# Altium PCB PCB1.PcbDoc (part 2 of 2)
Units mm, origin at the board's own origin, x right, y up, seen from the top; angles counter-clockwise.
Board outline 70 x 15 mm, 4 copper layers (Top Layer, GND, VCC, Bottom Layer), stack 0.694 mm thick; 63 components, 43 nets, 212 pads, 80 vias.
Unrouted connection lines stored in the file: 38.
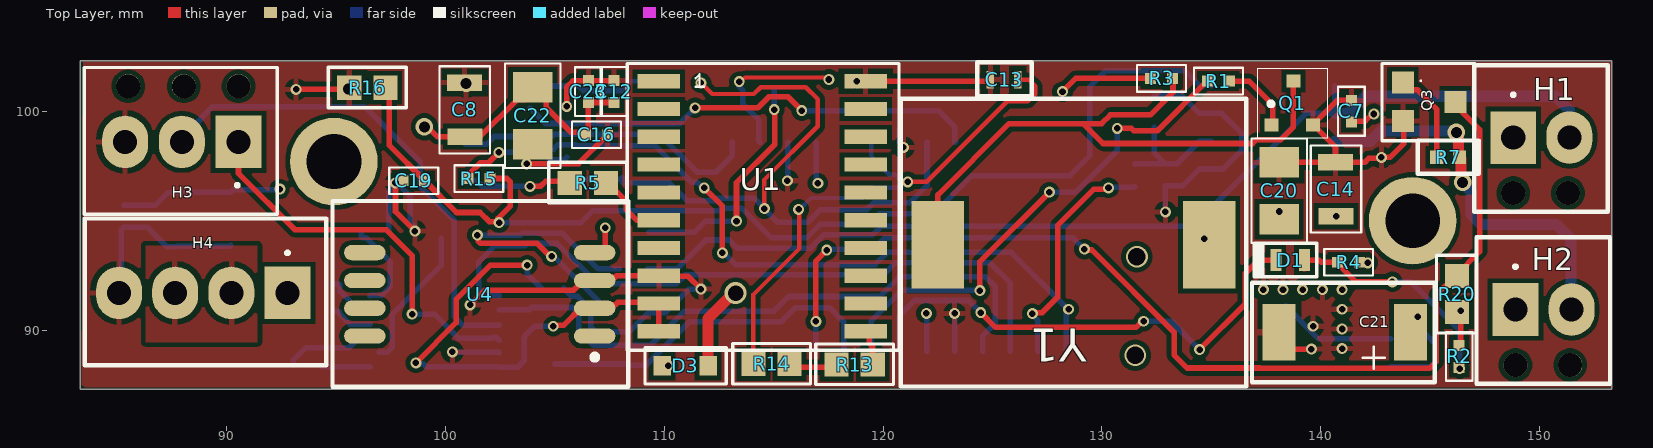
[diagram p0: Top Layer view]

## Part data (continued)
U3: "Microchip PIC18F2523-I/SO; 8bit PIC Microcontroller; 40MHz; 32 kB Flash; 28-Pin SOIC", Case/Package=SOIC, Frequency=40MHz, Manufacturer=Microchip, Max Operating Temperature=85°C, Max Power Dissipation=1W, Max Supply Voltage=5.5V, Min Operating Temperature=-40°C, Min Supply Voltage=4.2V, Package Quantity=27, Category=Microcontrollers, ComponentLink1Description=https://datasheet.ciiva.com/1493/39755c-1493947.pdf?src-supplier=Digikey, ComponentLink1URL=https://datasheet.ciiva.com/1493/39755c-1493947.pdf?src-supplier=Digikey, ComponentLink2Description=https://datasheet.ciiva.com/16478/39755c-16478411.pdf?src-supplier=Future+Electronics, ComponentLink2URL=https://datasheet.ciiva.com/16478/39755c-16478411.pdf?src-supplier=Future+Electronics, ComponentLink3Description=https://datasheet.ciiva.com/7774/39755c-7774347.pdf?src-supplier=Element14, ComponentLink3URL=https://datasheet.ciiva.com/7774/39755c-7774347.pdf?src-supplier=Element14, Core Architecture=PIC, Data Bus Width=8b, Density=32KB, Height=2.35mm, Interface=I2C,SPI,UART,USART, Lead Free="Lead Free", Length=17.9mm, Manufacturer Part Number=PIC18F2523-I/SO, Max Frequency=40MHz, Memory Size=32KB, Memory Type=FLASH, Mount="Surface Mount", Number of ADC Channels=10, Number of Bits=8, Number of I2C Channels=1, Number of I/Os=25, Number of Pins=28, Number of Programmable I/O=25, Number of PWM Channels=2, Number of SPI Channels=1, Number of Timers/Counters=4, Number of UART Channels=1, Oscillator Type=Internal, Packaging=Rail/Tube, Peripherals="Brown-out Detect/Reset,POR,PWM,WDT,HLVD,I2C", Pricing 1="54=4,674, 108=4,667 (USD)", Radiation Hardening=No, RAM Size=1.5KB, Reach SVHC Compliant=No, RoHS=Yes, RoHS Compliant=Yes, Series="PIC® 18F", Stock 1=54, Supplier 1="Arrow Electronics", Supplier Part Number 1=PIC18F2523-I/SO, Termination=SMD/SMT, Watchdog Timer=Yes, Width=7.5mm
U4: "SENSOR ABS PRESS 16.7PSI MAX", Case/Package=SSOP, Manufacturer="NXP Semiconductors", Max Operating Temperature=125°C, Max Supply Voltage=5.25V, Min Operating Temperature=-40°C, Min Supply Voltage=4.75V, Operating Pressure=16.68PSI, Operating Supply Voltage=5V, Supply Current=6mA, Accuracy=1.5%, Category="Pressure Sensors", ComponentLink1Description=https://datasheet.ciiva.com/2825/mpxa6115a-2825344.pdf?src-supplier=Digikey, ComponentLink1URL=https://datasheet.ciiva.com/2825/mpxa6115a-2825344.pdf?src-supplier=Digikey, ComponentLink2Description=https://datasheet.ciiva.com/1513/1748876-1513862.pdf?src-supplier=Element14, ComponentLink2URL=https://datasheet.ciiva.com/1513/1748876-1513862.pdf?src-supplier=Element14, Manufacturer Part Number=MPXH6115A6U, Max Pressure=58.02PSI, Number of Pins=8, Output Type="Analog Voltage,Analog", Port Style="No Port", Pressure Type=Absolute, Pricing 1="65=9,711, 130=9,651, 520=8,857, 1040=8,847 (USD)", Reach SVHC Compliant=No, RoHS=No, Series=MPXH6115A, Stock 1=5, Supplier 1="Arrow Electronics", Supplier Part Number 1=MPXH6115A6U, Termination=PCB
U5: "IRF7101PBF Dual N-channel MOSFET Transistor; 3.5 A; 20 V; 8-Pin SOIC", Case/Package=SOIC, Continuous Drain Current (ID)=3.5A, Drain to Source Voltage (Vdss)=20V, Drain-source On Resistance-Max=100mR, Gate to Source Voltage (Vgs)=12V, Input Capacitance=320pF, Manufacturer="International Rectifier", Max Operating Temperature=150°C, Max Power Dissipation=2W, Min Operating Temperature=-55°C, Package Quantity=1, Supplier Part Number 1=70016974, ComponentLink1Description=https://datasheet.ciiva.com/6385/irf7101pbf-6385610.pdf?src-supplier=Digikey, ComponentLink1URL=https://datasheet.ciiva.com/6385/irf7101pbf-6385610.pdf?src-supplier=Digikey, ComponentLink2Description=https://datasheet.ciiva.com/6385/irf7101pbf-6385613.pdf?src-supplier=Digikey, ComponentLink2URL=https://datasheet.ciiva.com/6385/irf7101pbf-6385613.pdf?src-supplier=Digikey, ComponentLink3Description=https://datasheet.ciiva.com/6385/irf7101pbf-6385615.pdf?src-supplier=Digikey, ComponentLink3URL=https://datasheet.ciiva.com/6385/irf7101pbf-6385615.pdf?src-supplier=Digikey, ComponentLink4Description=https://datasheet.ciiva.com/16359/irf7101pbf-16359627.pdf?src-supplier=Future+Electronics, ComponentLink4URL=https://datasheet.ciiva.com/16359/irf7101pbf-16359627.pdf?src-supplier=Future+Electronics, Current Rating=3.5A, FET Type="2 N-Channel", Height=1.5mm, Lead Free="Lead Free", Length=5mm, Manufacturer Part Number=IRF7101TRPBF, Mount="Surface Mount", Number of Pins=8, Packaging="Cut Tape", Rds On Max=100mR, RoHS=Yes, RoHS Compliant=Yes, Series=HEXFET®, Supplier 1="Allied Electronics", Turn-Off Delay Time=24ns, Turn-On Delay Time=7ns, Voltage Rating (DC)=20V, Width=4mm
U6: "MC78M00 Series 0.5 A 5 V Fixed Output SMT LDO Voltage Regulator - DPAK", Case/Package=DPAK, Current Rating=700mA, Dropout Voltage=2V, Input Bias Current=3.2mA, Manufacturer="ON Semiconductor", Max Input Voltage=35V, Max Operating Temperature=125°C, Max Output Current=500mA, Min Input Voltage=7V, Min Operating Temperature=-40°C, Min Output Voltage=5V, Package Quantity=75, Power Supply Rejection Ratio (PSRR)=80dB, Supplier Part Number 1=8771974, Accuracy=4%, Category="Voltage Regulators - Linear", ComponentLink1Description=https://datasheet.ciiva.com/2052/mc78m00-d-2052360.pdf?src-supplier=Digikey, ComponentLink1URL=https://datasheet.ciiva.com/2052/mc78m00-d-2052360.pdf?src-supplier=Digikey, ComponentLink2Description=https://datasheet.ciiva.com/3224/mc78m00-d-3224079.pdf?src-supplier=Avnet, ComponentLink2URL=https://datasheet.ciiva.com/3224/mc78m00-d-3224079.pdf?src-supplier=Avnet, ComponentLink3Description=https://datasheet.ciiva.com/16381/mc78m00-d-16381163.pdf?src-supplier=Future+Electronics, ComponentLink3URL=https://datasheet.ciiva.com/16381/mc78m00-d-16381163.pdf?src-supplier=Future+Electronics, ComponentLink4Description=https://datasheet.ciiva.com/7992/1746757-7992652.pdf?src-supplier=Element14, ComponentLink4URL=https://datasheet.ciiva.com/7992/1746757-7992652.pdf?src-supplier=Element14, ComponentLink5Description=https://datasheet.ciiva.com/4882/mc78m00-d-88441-4882543.pdf?src-supplier=Mouser, ComponentLink5URL=https://datasheet.ciiva.com/4882/mc78m00-d-88441-4882543.pdf?src-supplier=Mouser, ComponentLink6Description=https://datasheet.ciiva.com/18435/70099623-18435694.pdf?src-supplier=Allied+Electronics, ComponentLink6URL=https://datasheet.ciiva.com/18435/70099623-18435694.pdf?src-supplier=Allied+Electronics, Halogen Free="Halogen Free", Height=2.38mm, Lead Free="Lead Free", Length=6.73mm, Manufacturer Part Number=MC78M05BDTG, Mount="Surface Mount", Nominal Output Voltage=5V, Nominal Supply Current=3.2mA, Number of Channels=1, Number of Outputs=1, Number of Pins=3, Number of Regulators=1, Operating Supply Voltage=35V, Output Configuration=Positive, Output Current=500mA, Output Type=Fixed, Output Voltage=5V, Packaging=Rail/Tube, Polarity=Positive, Pricing 1="1=0,22, 200=0,215, 750=0,205, 2000=0,198, 7500=0,185 (USD)", Radiation Hardening=No, Reach SVHC Compliant=No, RoHS=Yes, RoHS Compliant=Yes, Series=-, Stock 1=7370, Supplier 1="Future Electronics", Width=6.22mm
X1: library part NX5032GA-10.000000MHZ-LN-CD-1, "Crystal 10.0000MHZ 8PF SMD", Case/Package=SMD/SMT, ESR (Equivalent Series Resistance)=120R, Frequency=10MHz, Frequency Stability=50ppm, Load Capacitance=8pF, Manufacturer=NDK, Max Operating Temperature=70°C, Min Operating Temperature=-10°C, Package Quantity=1, Supplier Part Number 1=NX5032GA-10.00E, Category=Crystals, ComponentLink1Description=https://datasheet.ciiva.com/856/nx5032ga-856809.pdf?src-supplier=Digikey, ComponentLink1URL=https://datasheet.ciiva.com/856/nx5032ga-856809.pdf?src-supplier=Digikey, ComponentLink2Description=https://datasheet.ciiva.com/856/nx5032ga-856810.pdf?src-supplier=Digikey, ComponentLink2URL=https://datasheet.ciiva.com/856/nx5032ga-856810.pdf?src-supplier=Digikey, ComponentLink3Description=https://datasheet.ciiva.com/856/nx5032ga-856811.pdf?src-supplier=Digikey, ComponentLink3URL=https://datasheet.ciiva.com/856/nx5032ga-856811.pdf?src-supplier=Digikey, Frequency Tolerance=50ppm, Height=0.059inch, Length=0.197inch, Manufacturer Part Number=NX5032GA-10.000000MHZ-LN-CD-1, Mount="Surface Mount", Number of Pins=2, Packaging="Cut Tape", RoHS=Yes, Series=NX5032GA, Supplier 1="Richardson RFPD", Width=0.126inch
Y1: library part PKLCS1212E4001-R1, "AUDIO PIEZO TRANSDUCER 25V SMD / Audio Buzzer Piezo 75dB Surface Mount Solder Pad T/R", Clock Frequency=4kHz, Manufacturer=Murata, Max Operating Temperature=70°C, Max Supply Voltage=25V, Min Operating Temperature=-20°C, Nominal Supply Voltage=3V, Package Quantity=1, Supplier Part Number=81-PKLCS1212E4001, Voltage Rating=1.5V, Category=Speakers, ComponentLink1Description=https://datasheet.ciiva.com/4625/pklcs-datasheet-202916-4625328.pdf?src-supplier=Mouser, ComponentLink1URL=https://datasheet.ciiva.com/4625/pklcs-datasheet-202916-4625328.pdf?src-supplier=Mouser, ComponentLink2Description=https://datasheet.ciiva.com/16224/s0039e-16224145.pdf?src-supplier=Future+Electronics, ComponentLink2URL=https://datasheet.ciiva.com/16224/s0039e-16224145.pdf?src-supplier=Future+Electronics, ComponentLink3Description=https://datasheet.ciiva.com/11776/0900766b807da0c7-11776763.pdf?src-supplier=Rs, ComponentLink3URL=https://datasheet.ciiva.com/11776/0900766b807da0c7-11776763.pdf?src-supplier=Rs, ComponentLink4Description=https://datasheet.ciiva.com/3333/03787173-3333942.pdf?src-supplier=Distrelec, ComponentLink4URL=https://datasheet.ciiva.com/3333/03787173-3333942.pdf?src-supplier=Distrelec, ComponentLink5Description=https://datasheet.ciiva.com/1323/1626578-1323984.pdf?src-supplier=Element14, ComponentLink5URL=https://datasheet.ciiva.com/1323/1626578-1323984.pdf?src-supplier=Element14, ComponentLink6Description=https://datasheet.ciiva.com/0/s0039e-123.pdf?src-supplier=Digikey, ComponentLink6URL=https://datasheet.ciiva.com/0/s0039e-123.pdf?src-supplier=Digikey, ComponentLink7Description=https://datasheet.ciiva.com/0/s0039e-124.pdf?src-supplier=Digikey, ComponentLink7URL=https://datasheet.ciiva.com/0/s0039e-124.pdf?src-supplier=Digikey, ComponentLink8Description=https://datasheet.ciiva.com/0/s0039e-125.pdf?src-supplier=Digikey, ComponentLink8URL=https://datasheet.ciiva.com/0/s0039e-125.pdf?src-supplier=Digikey, ComponentLink9Description=https://datasheet.ciiva.com/18141/p37e-18141127.pdf?src-supplier=Verical, ComponentLink9URL=https://datasheet.ciiva.com/18141/p37e-18141127.pdf?src-supplier=Verical, ComponentLink10Description=https://datasheet.ciiva.com/8084/p37e-8084265.pdf?src-supplier=Avnet, ComponentLink10URL=https://datasheet.ciiva.com/8084/p37e-8084265.pdf?src-supplier=Avnet, ComponentLink11Description=https://datasheet.ciiva.com/1323/9058-1323985.pdf?src-supplier=Element14, ComponentLink11URL=https://datasheet.ciiva.com/1323/9058-1323985.pdf?src-supplier=Element14, Depth=12mm, Diameter=12mm, Frequency=4kHz, Height=3mm, Lead Free="Lead Free", Length=12mm, Manufacturer Part Number=PKLCS1212E4001-R1, Mounting Technology="Surface Mount", Packaging="Tape and Reel", Pricing="1=1,04, 10=0,86, 50=0,758, 100=0,718, 1000=0,534, 10000=0,529 (USD)", Radiation Hardening=No, Reach SVHC Compliant=No, RoHS=Yes, Self Resonant Frequency=4kHz, Series=PK, Stock=27239, Supplier=Mouser, Termination=Solder, Voltage Rating (DC)=25V, Washable=No, Width=12mm

## Free pads (board coordinates)
  round 4 hole 2.5: 1(94.9,97.7) 1(144.2,95)

## Via types
v1: diameter 0.5, hole 0.3, Top Layer to Bottom Layer, 70 vias
v2: diameter 0.8, hole 0.5, Top Layer to Bottom Layer, 5 vias
v3: diameter 0.5/0.5 (per signal layer), hole 0.3, Top Layer to Bottom Layer, 2 vias
v4: diameter 1, hole 0.8, Top Layer to Bottom Layer, 2 vias
v5: diameter 1, hole 0.7, Top Layer to Bottom Layer, 1 vias

## Nets (pads, with @x,y where several pads share a name; then routed paths per layer and width w, separated by ;. In a path a pad name is that pad's centre, name@x,y a point inside that pad or via, vN(x,y) a via of type N, cw(c..) or ccw(c..) an arc to the next point about the centre after c; other vN are vias at no path point)
+BAT: C20.2 C21.1 D3.2 H1.1 H2.1 R17.1 U6.1 | length 5.3
  Top Layer w0.508: D3.2 112,90.537 113.151,91.688 v5(113.259,91.688)
  Bottom Layer w0.254: v1(144.425,90.6) 144.472,90.553 144.472,90.128 R17.1@145.1,89.5
  other v1: 138.1,95.418
  other v4: 131.522,88.85
+VIN: D3.1 H4.1
  other v1: 110.175,88.375
BUZZER: R1.1 U3.22 | length 22.7
  Top Layer w0.254: v1(124.425,91.8) 124.425,93.125 v1(127.6,96.3) ; v1(130.7,99.215) 131.347,99.215 131.458,99.104 132.529,99.104 R1.1@134.8,101.375
  Bottom Layer w0.254: U3.22 119.465,90.431 120.848,91.814 124.411,91.814 v1(124.425,91.8) ; v1(127.6,96.3) 128.8,96.3 130.7,98.2 v1(130.7,99.215)
CHRG1: R11.2 U3.16 | length 10.8
  Top Layer w0.254: v1(126.825,90.75) 126.872,90.797 127.272,90.797 127.975,91.5 127.975,94.782 129.635,96.442 130.242,96.442 v1(130.3,96.5)
  Bottom Layer w0.254: v1(126.825,90.75) 126.825,90.683 127.077,90.431 127.077,89.033 U3.16 ; v1(130.3,96.5) 130.325,96.525 131.475,96.525 R11.2@131.5,96.55
CHRG1_DETCT: Q3.3 R20.1 U3.24 | length 49
  Top Layer w0.254: v1(116.925,90.394) 116.925,93.15 v1(117.425,93.65) ; v1(129.2,93.7) 129.242,93.658 129.542,93.658 133.299,89.901 133.299,88.863 133.897,88.265 137.208,88.265 137.21,88.263 144.99,88.263 145.275,88.548 145.275,91.6 146.2,92.525 147.262,93.587 147.262,99.163 Q3.3@146.2,100.225
  Bottom Layer w0.254: U3.24@116.925,89.1 v1(116.925,90.394) ; v1(117.425,93.65) 117.472,93.697 119.554,93.697 120.073,94.216 128.684,94.216 v1(129.2,93.7)
CHRG1_SENSE: H2.2 R7.2 U5.7 U5.8 | length 19.3
  Top Layer w0.508: v2(146.202,99.035) 146.202,98.956 146.304,98.854 146.304,97.946 R7.2@146.396,97.854 ; R7.2@146.416,97.834 146.416,96.814 v2(146.482,96.749)
  Bottom Layer w0.254: U5.8 U5.7 ; v2@146.482,96.708 v2(146.482,96.749)
  Bottom Layer w0.508: U5.7 142.268,98.63 142.728,99.09 146.147,99.09 v2(146.202,99.035) ; v2@146.482,96.708 146.863,96.327 146.863,95.275 147.32,94.818 150.774,94.818 151.44,94.153 H2.2@151.44,90.94
CHRG2: R15.2 U3.15 | length 34.7
  Top Layer w0.254: 101.15,97.2 101.587,97.637 101.955,97.637 v1(102.438,98.12) ; v1(111.825,96.5) 112.652,95.673 v1(112.652,93.53)
  Bottom Layer w0.254: v1(102.438,98.12) 103.069,98.12 103.196,98.247 104.916,98.247 105.147,98.479 105.927,98.479 105.978,98.427 109.576,98.427 111.254,96.749 111.509,96.749 111.758,96.5 v1(111.825,96.5) ; v1(112.652,93.53) 112.719,93.53 113.259,92.989 119.634,92.989 120.193,93.548 125.846,93.548 128.445,90.95 v1(128.475,90.95) 128.475,90.883 128.365,90.773 128.365,89.035 U3.15
CHRG2_DETCT: Q2.3 R21.1 U3.23 | length 15.9
  Bottom Layer w0.254: R21.1 108.35,88.45 Q2.3 109.175,88.4 111.162,90.387 115.355,90.387 115.993,91.025 117.55,91.025 118.195,90.38 U3.23
CHRG2_SENSE: H1.2 R19.2 U5.5 U5.6 | length 48.5
  Bottom Layer w0.254: R19.2 110.58,92.8 111.897,94.117 112.96,94.117 113.329,93.747 116.692,93.747 117.308,94.363 119.534,94.363 119.917,94.746 134.169,94.746 139.323,99.9 U5.6 U5.5
  Bottom Layer w0.508: U5.6 141.253,99.9 142.039,100.686 150.735,100.686 151.37,100.051 H1.2@151.37,98.8
GND: C1.1 C2.1 C5.1 C6.2 C7.1 C8.2 C9.2 C10.2 C11.1 C12.1 C13.1 C14.1 C15.1 C16.1 C17.1 C18.2 C19.1 C20.1 C21.2 C22.1 C23.1 C24.1 D2.2 H3.3 H4.4 Q1.2 Q2.2 Q3.2 R12.2 R16.2 U1.8 U1.20 U2.15 U3.4 U3.8 U3.19 U4.3 U5.1 U5.3 U6.4 | length 89.7
  Top Layer w0.254: v1(93.175,101) 95.55,101 R16.2@95.6,100.95 ; C19.1 97.995,96.77 97.761,96.77 v1(97.714,96.723) 97.714,95.411 v1(98.6,94.525) ; v1(101.125,91.15) 101.8,91.825 105.861,91.825 U4.3@106.371,92.335 ; v1(103.708,97.597) 104.974,97.597 104.988,97.61 106.085,97.61 C16.1 ; v1(105.54,100.222) 105.54,101.109 105.818,101.387 106.287,101.387 106.3,101.4 C12.1 ; U4.3@106.85,92.335 106.935,92.42 107.757,92.42 107.822,92.485 109.75,92.485 109.78,92.455 111.095,92.455 v1(111.675,91.875) ; v1(118.786,101.371) 124.854,101.371 124.902,101.419 C13.1 ; C21.2@138.1,89.948 138.1,89.648 138.623,89.125 v1(139.575,89.125) ; C20.1@138.103,97.67 C14.1 ; Q1.2 Q1.2@139.675,99.375 ; C7.1 140.75,100.5 139.848,99.598 139.848,99.548 Q1.2@139.675,99.375 ; v1(142.773,97.892) 143.167,97.892 143.8,98.524 Q3.2@143.8,99.35 ; v1@142.82,97.939 142.726,97.845 142.19,97.845 142.015,97.67 C14.1 ; Q1.2@139.675,99.375 140.675,98.375 C14.1
  Bottom Layer w0.254: H4.4 85.19,91.81 85.19,94.59 C1.1 86.375,94.7 87.275,93.8 87.7,93.8 87.732,93.832 90.155,93.832 C11.1@90.187,93.865 ; v2(95.555,101.016) v2@95.64,101.016 ; C5.1 97.4,96.343 97.714,96.657 v1(97.714,96.723) 97.78,96.723 98.382,96.121 98.382,95.87 98.387,95.865 98.387,94.922 98.536,94.773 98.552,94.773 98.6,94.725 v1(98.6,94.525) ; v1(100.318,88.999) 100.33,88.987 102.438,88.987 U2.15 ; v1(101.125,91.15) v1@101.125,91.217 ; v1(103.708,97.597) 104.612,97.597 104.798,97.783 105.429,97.783 C18.2 ; C10.2 105.761,91.539 106.036,91.539 106.644,90.931 106.644,90.142 106.867,89.919 108.394,89.919 Q2.2 110.05,90.8 111.125,91.875 v1(111.675,91.875) ; v1(115.625,96.825) 115.64,96.84 115.64,98.56 U3.4 ; C24.1@118.786,101.146 v1(118.786,101.371) ; U3.8 U3.8@120.735,99.197 ; v1(123.272,90.763) 123.274,90.762 123.274,89.026 U3.19 ; R12.2@132.4,100.7 133.667,100.7 134.467,99.9 U5.3 135.476,99.9 136.4,98.976 136.4,98.227 135.533,97.36 U5.1 134.467,97.36 133.707,96.6 C17.1 v1(132.9,95.402) ; U6.4 139.9,89.6 D2.2 ; U6.4@140.962,89.993 U6.4@140.962,90.038
  other v1: 140.975,89.15 140.975,90.05 139.65,90.175 140.975,90.95 137.375,91.85 138.275,91.85 139.175,91.85 140.075,91.85 140.975,91.85 120.929,98.349
  other v2: 100.94,101.27
LED_STATUS: D1.2 U3.21 | length 22.8
  Top Layer w0.254: v1(124.461,90.799) 125.141,90.119 131.556,90.119 131.839,90.402 v1(131.906,90.402) ; v1(134.468,89.103) 136.55,91.186 136.55,92.59 137.16,93.2 D1.2
  Bottom Layer w0.254: U3.21 120.735,90.639 121.446,91.35 123.91,91.35 v1(124.461,90.799) ; v1(131.906,90.402) 133.169,90.402 v1(134.468,89.103)
NetC2_2: C2.2 U2.2 | length 6.6
  Bottom Layer w0.254: U2.2@96.968,88.992 97.35,88.992 97.561,89.203 97.561,90.704 99.8,92.942 C2.2@99.8,94.2
NetC3_1: C3.1 U2.5 | length 2.3
  Bottom Layer w0.254: C3.1 95.125,92.1 95.173,92.052 95.173,91.784 96.008,90.949 96.526,90.949 U2.5
NetC3_2: C3.2 U2.4 | length 1.9
  Bottom Layer w0.254: C3.2 95.125,90.85 95.173,90.802 95.173,90.721 95.619,90.275 U2.4
NetC4_1: C4.1 U2.3 | length 4.1
  Bottom Layer w0.254: C4.1 93.05,88.625 93.609,89.184 95.591,89.184 95.953,89.546 96.077,89.546 96.156,89.625 U2.3
NetC4_2: C4.2 U2.1 | length 2.3
  Bottom Layer w0.254: C4.2 94.3,88.373 94.348,88.325 U2.1
NetC5_2: C5.2 U2.6 | length 4.3
  Bottom Layer w0.254: C5.2 96.15,94.275 96.198,94.227 96.366,94.227 97.481,93.112 97.481,91.988 97.092,91.599 96.574,91.599 U2.6
NetC15_2: C15.2 R10.1 R18.2 X1.2 | length 7
  Bottom Layer w0.203: X1.2 108.496,101.371 R10.1@110.554,101.371
  Bottom Layer w0.254: R18.2 103.873,101.155 105.346,101.155 C15.2 106.072,101.168 106.29,100.95 X1.2
NetC17_2: C17.2 R11.1 R12.1 U5.2 | length 5.8
  Bottom Layer w0.254: R11.1@131.5,97.6 132.777,97.6 C17.2 ; R12.1 132.4,98.1 132.777,97.723 C17.2 ; U5.2 134.467,98.63 133.437,97.6 C17.2
NetC18_1: C18.1 R10.2 U3.9 X1.1 | length 32
  Top Layer w0.203: v1(111.675,101.3) 112.187,100.788 114.09,100.788 114.401,101.1 114.6,101.1 ; v1(114.575,95.55) 114.575,96.879 117.012,99.315 117.012,100.558 116.469,101.1 115.45,101.1 ; 114.6,101.101 115.45,101.101
  Bottom Layer w0.254: C18.1 108.017,96.892 X1.1 ; X1.1@108.1,96.725 110.225,96.725 111.037,95.913 112.33,95.913 112.443,96.026 114.099,96.026 v1(114.575,95.55) 114.575,95.536 115.183,94.928 116.561,94.928 117.136,95.504 119.253,95.504 119.564,95.815 121.215,95.815 122.005,96.605 U3.9 ; v1(111.675,101.3) 111.775,101.2 R10.2@111.783,101.2
NetC19_2: C19.2 R15.1 R16.1 U5.4 | length 50.8
  Top Layer w0.254: R16.1 97.425,100.9 97.425,98.45 C19.2 100.503,95.372 101.584,95.372 101.999,94.957 102.405,94.957 v1(102.452,94.91) ; R15.1 102.801,96.926 102.95,96.778 102.95,95.65 v1@102.4,95.1
  Bottom Layer w0.254: v1(102.452,94.91) 106.184,94.91 106.722,95.449 112.522,95.449 112.635,95.562 113.543,95.562 114.894,94.211 116.5,94.211 117.116,94.827 119.338,94.827 119.818,95.307 122.302,95.307 124.057,97.062 128.54,97.062 129.438,97.96 129.438,101.116 130.176,101.854 133.783,101.854 134.467,101.17 U5.4
NetD1_1: D1.1 R2.2 R4.2 | length 10.6
  Top Layer w0.254: D1.1@139.25,92.793 D1.1 139.929,93.2 140.029,93.1 140.75,93.1 140.75,93.066 141.616,92.2 v3(143.275,92.2)
  Bottom Layer w0.254: v3(143.275,92.2) 144.122,92.2 146.35,89.972 v1(146.35,88.241)
NetD2_1: D2.1 R17.2 | length 2
  Bottom Layer w0.254: R17.2@145.1,88.416 145.007,88.323 D2.1@143.223,88.323 ; D2.1@143.223,88.323 D2.1 D2.1@143.223,88.323
NetH3_1: H3.1 U2.14 | length 18.1
  Top Layer w0.254: H3.1 90.54,97.16 93.109,94.591 97.29,94.591 98.475,93.406 v1(98.475,90.725)
  Bottom Layer w0.254: v1(98.475,90.725) 99.488,90.725 100.588,89.625 102.145,89.625 102.197,89.678 102.318,89.678 U2.14@102.45,89.546
NetH3_2: H3.2 U2.13 | length 22.5
  Bottom Layer w0.254: H3.2@87.949,98.75 89.109,99.958 89.36,100.209 96.311,100.209 98.851,97.669 98.851,96.551 100.406,94.996 100.406,90.619 100.808,90.217 U2.13@102.463,90.217
NetH4_2: H4.2 H4.3
NetQ1_1: Q1.1 R1.2 | length 3.2
  Top Layer w0.254: R1.2@135.875,101.375 136.725,101.375 137.8,100.3 Q1.1@137.8,99.5
NetQ1_3: Q1.3 R3.2 Y1.2 | length 28
  Top Layer w0.254: Y1.2 122.5,96.172 125.76,99.433 129.15,99.433 129.983,99.433 130.384,99.834 132.215,99.834 133.25,100.869 133.25,101.475 R3.2@133.275,101.5 ; 129.15,99.425 130.048,98.527 136.882,98.527 137.06,98.705 138.181,98.705 138.75,99.273 Q1.3
NetQ2_1: Q2.1 R19.1 | length 14.9
  Top Layer w0.254: v1(101.457,94.338) 101.504,94.291 101.504,94.057 101.599,93.962 104.195,93.962 104.286,93.872 104.787,93.37 v1(104.851,93.37)
  Bottom Layer w0.254: v1(101.457,94.338) 101.472,94.323 103.413,94.323 103.512,94.421 105.354,94.421 106.976,92.8 R19.1@107.95,92.8 ; v1(104.851,93.37) 104.898,93.323 105.002,93.323 Q2.1
NetQ3_1: Q3.1 R7.1 | length 4.2
  Top Layer w0.254: Q3.1@143.8,101.35 144.173,100.977 144.423,100.977 145.3,100.1 R7.1
NetR5_1: R5.1 U1.6 | length 3.4
  Top Layer w0.254: R5.1@107.35,96.8 108.255,95.895 108.255,95.504 108.734,95.025 U1.6@109.75,95.025
NetR5_2: R5.2 R6.1 | length 5
  Top Layer w0.254: v1(103.861,96.571) 104.346,96.571 104.575,96.799 R5.2@105.677,96.799
  Bottom Layer w0.254: R6.1 101.412,96.838 101.679,96.571 v1(103.861,96.571)
NetR8_1: R8.1 U4.4 | length 1.1
  Top Layer w0.254: U4.4@107.172,93.605 107.3,93.733 v1(107.3,94.675)
NetR8_2: R8.2 R9.1 | length 11
  Top Layer w0.254: v1(113.3,94.975) 113.3,96.741 115.05,98.491 115.05,100.05 v1(115.025,100.075)
  Bottom Layer w0.254: R8.2@109.3,94.475 111.388,94.475 111.888,94.975 v1(113.3,94.975) ; v1(115.025,100.075) R9.1@115.025,101.075
NetR13_1: R13.1 U1.11 | length 1.8
  Top Layer w0.254: U1.11@119.2,89.945 119.373,89.772 119.373,89.388 119.525,89.236 R13.1@119.525,88.3
NetR13_2: R13.2 R14.1 | length 1.9
  Top Layer w0.254: R14.1@115.725,88.3 R13.2@117.575,88.3
NetR18_1: R18.1 U3.10 | length 21.6
  Top Layer w0.254: v1(111.404,100.152) 114.272,100.152 114.782,100.662 115.268,100.662 ; 115.269,100.661 115.645,100.661 v1(116.281,100.025)
  Bottom Layer w0.254: R18.1 104.562,99.441 110.693,99.441 v1(111.404,100.152) ; v1(116.281,100.025) 122.525,100.025 123.275,99.275 U3.10 U3.10@123.324,98.624
RX: U2.12 U3.18 | length 28.6
  Bottom Layer w0.254: U2.12 103.828,90.925 103.934,91.031 105.804,91.031 106.1,90.735 106.1,89.968 106.768,89.3 109.357,89.3 110.908,90.851 115,90.851 115.681,91.533 119.849,91.533 120.747,92.431 124.686,92.431 125.124,91.994 125.124,90.304 124.545,89.725 U3.18
SENS_ACC_X: C6.1 R6.2 U3.2 | length 14
  Bottom Layer w0.254: R6.2 101.866,98.488 102.212,98.834 102.226,98.848 C6.1 ; C6.1@103.708,98.85 104.863,98.85 104.955,98.943 109.779,98.943 111.509,97.213 112.346,97.213 113.115,97.982 U3.2
SENS_ACC_Y: C13.2 R14.2 U3.7 | length 25
  Top Layer w0.203: R14.2 114.075,91.627 116.175,93.727 116.175,95.483 v1(116.143,95.515) ; v1(121.125,96.775) 121.992,96.775 125.674,100.457 126.619,100.457 126.949,100.787 126.949,101.143 126.644,101.448 C13.2
  Bottom Layer w0.203: v1(116.143,95.515) 116.185,95.515 116.707,96.037 119.1,96.037 119.564,96.501 120.758,96.501 121.031,96.775 v1(121.125,96.775) 121.068,96.832 120.896,96.832 120.858,96.87 120.777,96.87 120.543,97.104 120.283,97.104 119.465,97.923 U3.7
SENS_PRESS: C24.2 R9.2 U3.3 | length 7.5
  Top Layer w0.203: v1(113.425,101.35) 113.499,101.35 113.692,101.543 117.351,101.543 117.445,101.45 v1(117.525,101.45)
  Bottom Layer w0.254: v1(113.425,101.35) 113.425,101.125 113.582,100.968 113.582,100.343 114.309,99.616 114.309,98.651 U3.3 ; C24.2@117.525,101.327 v1(117.525,101.45)
TX: U2.11 U3.17 | length 31.6
  Bottom Layer w0.254: U2.11 102.433,91.592 101.808,91.592 101.519,91.881 101.519,93.112 102.267,93.859 103.634,93.859 103.732,93.957 105.1,93.957 106.938,92.119 110.555,92.119 110.962,92.525 120.008,92.525 120.567,93.084 124.873,93.084 125.815,92.142 U3.17
VCC: C1.2 C7.2 C8.1 C9.1 C10.1 C11.2 C12.2 C14.2 C16.2 C22.2 C23.2 R2.1 R3.1 R4.1 R20.2 R21.2 U1.9 U1.10 U2.16 U3.5 U3.20 U4.2 U6.3 Y1.1 | length 54
  Top Layer w0.254: v1(98.65,88.5) 100.488,90.338 100.488,91.406 102.049,92.966 v3(103.734,92.966) ; v2(99.035,99.289) 99.182,99.289 99.641,98.83 C8.1@101.155,98.83 ; C8.1@101.155,98.841 101.581,98.841 103.259,100.519 103.618,100.519 104.191,101.092 104.612,100.671 104.612,100.16 105.724,99.048 106.277,99.048 C16.2 106.523,99.048 106.523,99.193 106.527,99.197 106.527,99.747 106.528,99.748 C23.2 ; v1(104.925,90.175) 104.972,90.222 105.407,90.222 106.25,91.065 106.85,91.065 106.935,91.15 107.757,91.15 107.872,91.265 109.7,91.265 109.75,91.215 U1.10@109.75,89.945 ; C23.2@106.528,100.4 C12.2 ; v1(128.2,100.9) 128.8,101.5 R3.1@132.2,101.5 ; C7.2 141.494,99.594 141.494,99.577 141.523,99.548 142.031,99.548 142.358,99.875 v1(142.425,99.875) ; R2.1@146.4,89.2 v1(146.4,90.875)
  Bottom Layer w0.254: C1.2 86.73,95.7 87.3,96.27 87.725,96.27 87.758,96.303 90.18,96.303 90.292,96.415 92.401,96.415 v1(92.431,96.444) ; v1(98.65,88.5) 98.697,88.453 98.989,88.453 99.117,88.325 U2.16 102.474,88.301 103.301,88.301 103.6,88.6 103.6,89.7 104.075,90.175 v1(104.925,90.175) R21.2 ; v3(103.734,92.966) 103.734,92.566 C10.1 ; U3.5 116.938,98.562 116.938,96.854 117.016,96.775 v1(117.016,96.709) ; v1(121.975,90.763) 121.99,90.748 121.99,89.04 U3.20
  other v1: 142.15,93.075 134.675,94.175 140.7,95.2
  other v4: 131.597,93.35
pads on no net: H1. H2. H3. U1.1 U1.2 U1.3 U1.4 U1.5 U1.7 U1.12 U1.13 U1.14 U1.15 U1.16 U1.17 U1.18 U1.19 U2.7 U2.8 U2.9 U2.10 U3.1 U3.6 U3.11 U3.12 U3.13 U3.14 U3.25 U3.26 U3.27 U3.28 U4.1 U4.5 U4.6 U4.7 U4.8

## Polygon pours and split planes (outlines as drawn)
GND on Top Layer "GND_L01_P003" (solid, pour order 3): 83.433,102.271 153.308,102.271 153.308,87.376 83.388,87.376 83.383,87.371
NetH4_2 on Top Layer "NETH4_2_L01_P001" (solid, pour order 1): 86.3,89.45 91.4,89.45 91.4,93.85 86.3,93.85
GND on Bottom Layer "GND_L04_P002" (solid, pour order 2): 83.363,102.377 83.363,87.452 153.263,87.452 153.263,102.377
VCC on VCC (split plane): 152.79,87.81 150.431,87.81 150.431,99.475 150.431,100.1 150.422,100.166 150.397,100.228 150.356,100.281 150.303,100.322 150.241,100.347 150.175,100.356 147.525,100.356 147.459,100.347 147.397,100.322 147.344,100.281 147.303,100.228 147.278,100.166 147.269,100.1 147.269,95.15 147.269,94.125 147.269,91.356 146.344,90.431 146.006,90.431 144.956,91.481 144.903,91.522 144.841,91.547 144.775,91.556 141.206,91.556 139.906,92.856 139.906,94.9 139.897,94.966 139.872,95.028 139.831,95.081 138.781,96.131 138.728,96.172 138.666,96.197 138.6,96.206 137.775,96.206 137.709,96.197 137.665,96.179 137.647,96.172 137.594,96.131 135.994,94.531 135.953,94.478 135.928,94.416 135.919,94.35 135.919,90.531 135.744,90.356 130.75,90.356 130.684,90.347 130.666,90.34 130.628,90.325 114.505,90.325 114.505,92.177 114.497,92.243 114.471,92.305 114.43,92.358 113.922,92.866 113.869,92.906 113.808,92.932 113.741,92.941 111.506,92.941 111.44,92.932 111.378,92.906 111.325,92.866 110.563,92.104 110.522,92.051 110.497,91.989 110.488,91.923 110.488,89.681 94.581,89.681 94.581,92.575 94.572,92.641 94.562,92.667 94.547,92.703 94.506,92.756 93.556,93.706 93.503,93.747 93.441,93.772 93.375,93.781 91.35,93.781 91.284,93.772 91.222,93.747 91.169,93.706 91.128,93.653 91.103,93.591 91.094,93.525 91.094,87.81 83.81,87.81 83.81,101.79 152.79,101.79
+BAT on VCC (split plane): 149.919,99.475 149.919,87.81 111,87.81 111,89.425 111,91.816 111.612,92.428 113.635,92.428 113.993,92.07 113.993,90.068 114.002,90.002 114.027,89.94 114.068,89.887 114.121,89.847 114.183,89.821 114.249,89.812 130.718,89.812 130.785,89.821 130.84,89.844 135.85,89.844 135.916,89.853 135.978,89.878 136.031,89.919 136.356,90.244 136.397,90.297 136.422,90.359 136.431,90.425 136.431,94.244 137.881,95.694 138.494,95.694 139.394,94.794 139.394,92.75 139.403,92.684 139.428,92.622 139.469,92.569 140.919,91.119 140.972,91.078 141.034,91.053 141.1,91.044 144.669,91.044 145.719,89.994 145.772,89.953 145.834,89.928 145.9,89.919 146.45,89.919 146.516,89.928 146.578,89.953 146.631,89.994 147.706,91.069 147.747,91.122 147.772,91.184 147.781,91.25 147.781,94.125 147.781,95.15 147.781,99.844 149.919,99.844
+VIN on VCC (split plane): 94.069,92.469 94.069,89.5 94.078,89.434 94.103,89.372 94.144,89.319 94.219,89.244 94.272,89.203 94.334,89.178 94.4,89.169 110.488,89.169 110.488,87.81 91.677,87.81 91.606,87.881 91.606,93.269 93.269,93.269
GND on GND (split plane): 152.79,87.81 83.81,87.81 83.81,101.79 152.79,101.79

## Other copper
VCC (plane layer: these items are gaps in the copper):
  lines w0.508: 91.65,87.475 91.35,87.775 91.35,93.525 93.375,93.525 94.325,92.575 94.325,89.5 94.4,89.425 110.744,89.425 ; 110.744,87.376 110.744,89.425 ; 114.654,87.2 115.011,87.2 ; 128.525,87.375 129.625,87.375 ; 150.175,87.225 150.175,99.475 150.175,100.1 147.525,100.1 147.525,95.15 147.525,94.125 147.525,91.25 146.45,90.175 145.9,90.175 144.775,91.3 143.05,91.3 141.1,91.3 139.65,92.75 139.65,94.9 138.6,95.95 137.775,95.95 136.175,94.35 136.175,90.425 135.85,90.1 130.75,90.1 130.718,90.068 114.249,90.068 114.249,92.177 113.741,92.685 111.506,92.685 110.744,91.923 110.744,89.425

## Silkscreen, mask and mechanical layers (free items; w line width, h text height)
Board Outline:
  lines w0.1: 83.3,87.3 83.3,102.275 153.3,102.275 153.3,87.3 83.3,87.3